# EAGLE board GIM-Scehmatic1 (EAGLE 7.3.0)
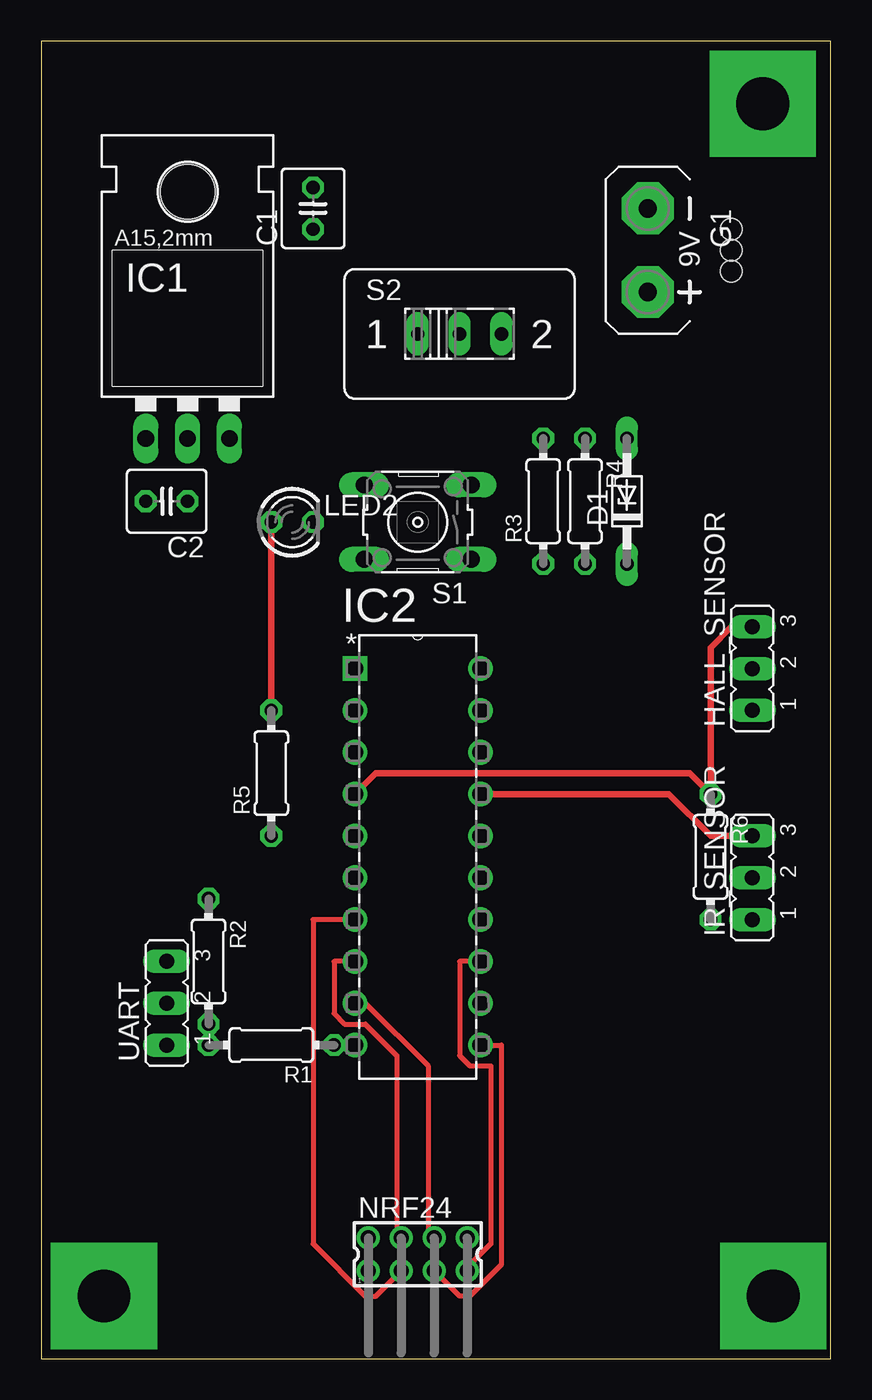
[diagram p0: board, top side]
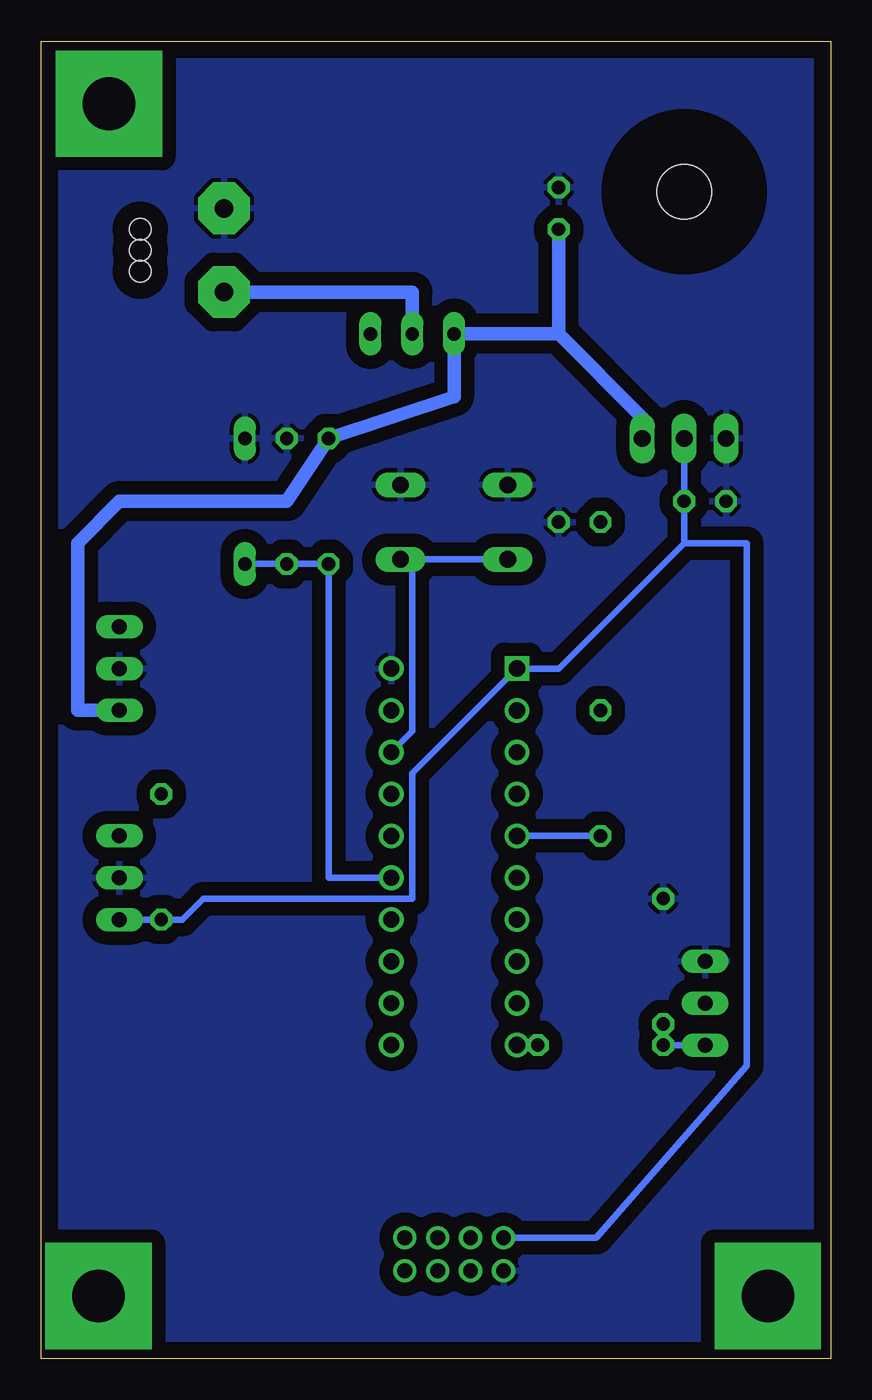
[diagram p1: board, bottom side, seen from below]

Size 47.93 x 80 mm. Coordinates in mm from the lower left corner, seen from the top.
Outline: 0,0 47.93,0 47.93,80 0,80 0,0
Copper layers (1*16): Top 0.035mm / dielectric 1.5mm / Bottom 0.035mm
Design rules "default": minimum track width 10mil, minimum drill 24mil, track to track 8mil, track to pad 8mil, pad to pad 8mil, via to via 8mil, smd to smd 8mil, copper to edge 40mil, drill to drill 8mil, minimum pad ring 10mil, minimum via ring 8mil, stop-mask expansion 4mil, vias tented up to drill 0mil, thermal gap 10mil
Holes 1.3 mm at 41.91,67.31 41.91,66.04 41.91,68.58

## Footprints (pad centres in the part's own frame; a part is rotated, then mirrored left to right if it is on the bottom)
C025-040X050 = drill 0.813 octagon: 1 -1.27,0; 2 1.27,0
DO34Z7 = drill 0.813 long: A 3.81,0; C -3.81,0
AB9V = drill 1.118 pad 3.15 octagon: + 0,2.54; - 0,-2.54
JP2 = drill 0.914 long: 1 -2.54,0; 2 0,0; 3 2.54,0
LD1117V33 = drill 1.016 long: GND -2.54,-8.89; IN 2.54,-8.89; OUT 0,-8.89 | hole 3.302: 0,6.096
DIP254P762X533-20 = drill 0.991 square: 1 -7.62,22.86 | drill 0.991: 2 -7.62,20.32; 3 -7.62,17.78; 4 -7.62,15.24; 5 -7.62,12.7; 6 -7.62,10.16; 7 -7.62,7.62; 8 -7.62,5.08; 9 -7.62,2.54; 10 -7.62,0; 11 0,0; 12 0,2.54; 13 0,5.08; 14 0,7.62; 15 0,10.16; 16 0,12.7; 17 0,15.24; 18 0,17.78; 19 0,20.32; 20 0,22.86
LED3MM = drill 0.813 octagon: A -1.27,0; K 1.27,0
332-08 = drill 0.9 pad 1.27: 1 -3,-1; 2 -3,1; 3 -1,-1; 4 -1,1; 5 1,-1; 6 1,1; 7 3,-1; 8 3,1
0204/7 = drill 0.813 octagon: 1 -3.81,0; 2 3.81,0
B3F-10XX = drill 1.016 long: 1 -3.251,2.261; 2 3.251,2.261; 3 -3.251,-2.261; 4 3.251,-2.261
M251 = drill 0.813 long: 1 -2.54,0; 2 0,0; 3 2.54,0

## Placement (x,y rotation side)
C1  10uF  [C025-040X050]  16.51,69.85 90 top
C2  10uF  [C025-040X050]  7.62,52.07 180 top
D1  BZV10  [DO34Z7]  35.56,52.07 90 top
G1  AB9V  [AB9V]  36.83,67.31 180 top
HALL_SENSOR  [JP2]  43.18,41.91 90 top
IC1  LD1117V33  [LD1117V33]  8.89,64.77 0 top
IC2  PIC16F690-I/P  [DIP254P762X533-20]  26.67,19.05 0 top
IR_SENSOR  [JP2]  43.18,29.21 90 top
LED2  TLLG4400  [LED3MM]  15.24,50.8 0 top
NRF24  332-08  [332-08]  22.86,6.35 0 top
R1  10k  [0204/7]  13.97,19.05 180 top
R2  20k  [0204/7]  10.16,24.13 270 top
R3  560K  [0204/7]  30.48,52.07 90 top
R4  330K  [0204/7]  33.02,52.07 270 top
R5  2.2K  [0204/7]  13.97,35.56 90 top
R6  10k  [0204/7]  40.64,30.48 270 top
S1  [B3F-10XX]  22.86,50.8 180 top
S2  [M251]  25.4,62.23 0 top
UART  [JP2]  7.62,21.59 90 top

## Library data of the parts
C1 C2 = rcl
D1 = diode
G1 = battery
HALL_SENSOR IR_SENSOR UART = jumper
IC1 = LD1117V33
IC2 = Microchip_By_element14_Batch_1; MPN: PIC16F690-I/P; OC_FARNELL: 1103406; OC_NEWARK: -; PACKAGE: DIP-20; SUPPLIER: Microchip
LED2 = led; MF: VISHAY SEMICONDUCTOR; OC_FARNELL: 1612435
NRF24 = con-garry
R1-R6 = resistor
S1 = switch-omron; MPN: B3F-1000; OC_FARNELL: 176432; OC_NEWARK: 36M3542
S2 = switch

## Nets
+3V3: C2.1 IC1.OUT IC2.1 IR_SENSOR.1 NRF24.2 R6.2
+9V: C1.1 HALL_SENSOR.1 IC1.IN R3.2 S2.1
CE: IC2.7 NRF24.3
CSN: IC2.8 NRF24.4
GND: C1.2 C2.2 D1.A G1.- HALL_SENSOR.2 IC1.GND IC2.20 IR_SENSOR.2 LED2.K NRF24.1 R2.1 R4.1 S1.3 S1.4 UART.3
HALL_IN: HALL_SENSOR.3 IC2.4 R6.1
IR_IN: IC2.17 IR_SENSOR.3
LED: IC2.5 R5.1
MISO: IC2.13 NRF24.7
MOSI: IC2.9 NRF24.6
N$1: IC2.10 R1.1
N$2: G1.+ S2.2
N$5: LED2.A R5.2
SCK: IC2.11 NRF24.5
SV: IC2.18 S1.1 S1.2
UART_TX: R1.2 R2.2 UART.1
VMET: D1.C IC2.15 R3.1 R4.2

## Tracks (layer width: path | path; a pad name or v marks a point on that pad's centre or on a via)
+3V3
  Bottom 0.406: IC1.OUT C2.1 8.89,49.53 | NRF24.2 14.24,7.35 5.08,17.78 5.08,49.53 8.89,49.53 | 8.89,49.53 16.51,41.91 IC2.1 25.4,35.56 25.4,27.94 38.1,27.94 39.37,26.67 R6.2 IR_SENSOR.1
+9V
  Bottom 0.406: IC1.IN 11.43,57.15
  Bottom 0.813: 11.43,57.15 16.51,62.23 | 16.51,62.23 C1.1 | 16.51,62.23 S2.1 22.86,58.42 R3.2 33.02,52.07 43.18,52.07 45.72,49.53 45.72,39.37 HALL_SENSOR.1
CE
  Top 0.305: NRF24.3 20.32,3.81 19.68,3.81 16.51,6.99 16.51,26.67 IC2.7
CSN
  Top 0.305: IC2.8 17.78,24.13 17.78,20.95 18.41,20.32 19.68,20.32 21.59,18.41 21.59,7.62 NRF24.4
GND
  pour Bottom (isolate 0.813, rank 6): -1.27,81.28 49.53,81.28 49.53,-1.27 -1.27,-1.27
HALL_IN
  Top 0.406: IC2.4 20.32,35.56 39.37,35.56 R6.1 40.64,43.18 41.91,44.45 HALL_SENSOR.3
IR_IN
  Top 0.406: IC2.17 38.1,34.29 40.64,31.75 IR_SENSOR.3
LED
  Bottom 0.406: R5.1 IC2.5
MISO
  Top 0.254: 26.04,5.71 NRF24.7
  Top 0.305: 26.04,5.71 27.3,6.99 27.3,17.78 26.04,17.78 25.4,18.41 25.4,24.13 IC2.13
MOSI
  Top 0.254: IC2.9 19.68,21.59
  Top 0.305: 19.68,21.59 23.5,17.78 23.5,7.62 NRF24.6
MOUNT1  (via drill 3.2 pad 6.45)
  other vias: 43.81,76.2
MOUNT4  (via drill 3.2 pad 6.45)
  other vias: 44.45,3.81
N$1
  Bottom 0.406: R1.1 IC2.10
N$2
  Bottom 0.813: S2.2 25.4,64.77 G1.+
N$3  (via drill 3.2 pad 6.45)
  other vias: 3.81,3.81
N$5
  Top 0.406: R5.2 LED2.A
SCK
  Top 0.305: NRF24.5 25.4,3.81 26.04,3.81 27.94,5.71 27.94,19.05 IC2.11
SV
  Bottom 0.406: S1.2 S1.1 25.4,47.83 25.4,38.1 IC2.18
UART_TX
  Bottom 0.406: UART.1 R1.2 R2.2
VMET
  Bottom 0.406: D1.C R4.2 R3.1 30.48,29.21 IC2.15